# Altium PCB PCB1.PcbDoc
Units mm, origin at the board's own origin, x right, y up, seen from the top; angles counter-clockwise.
Board outline 68.58 x 48.26 mm, 4 copper layers (Top Layer, Internal Plane 1, Internal Plane 2, Bottom Layer); 37 components, 37 nets, 168 pads, 11 vias.
Unrouted connection lines stored in the file: 2.
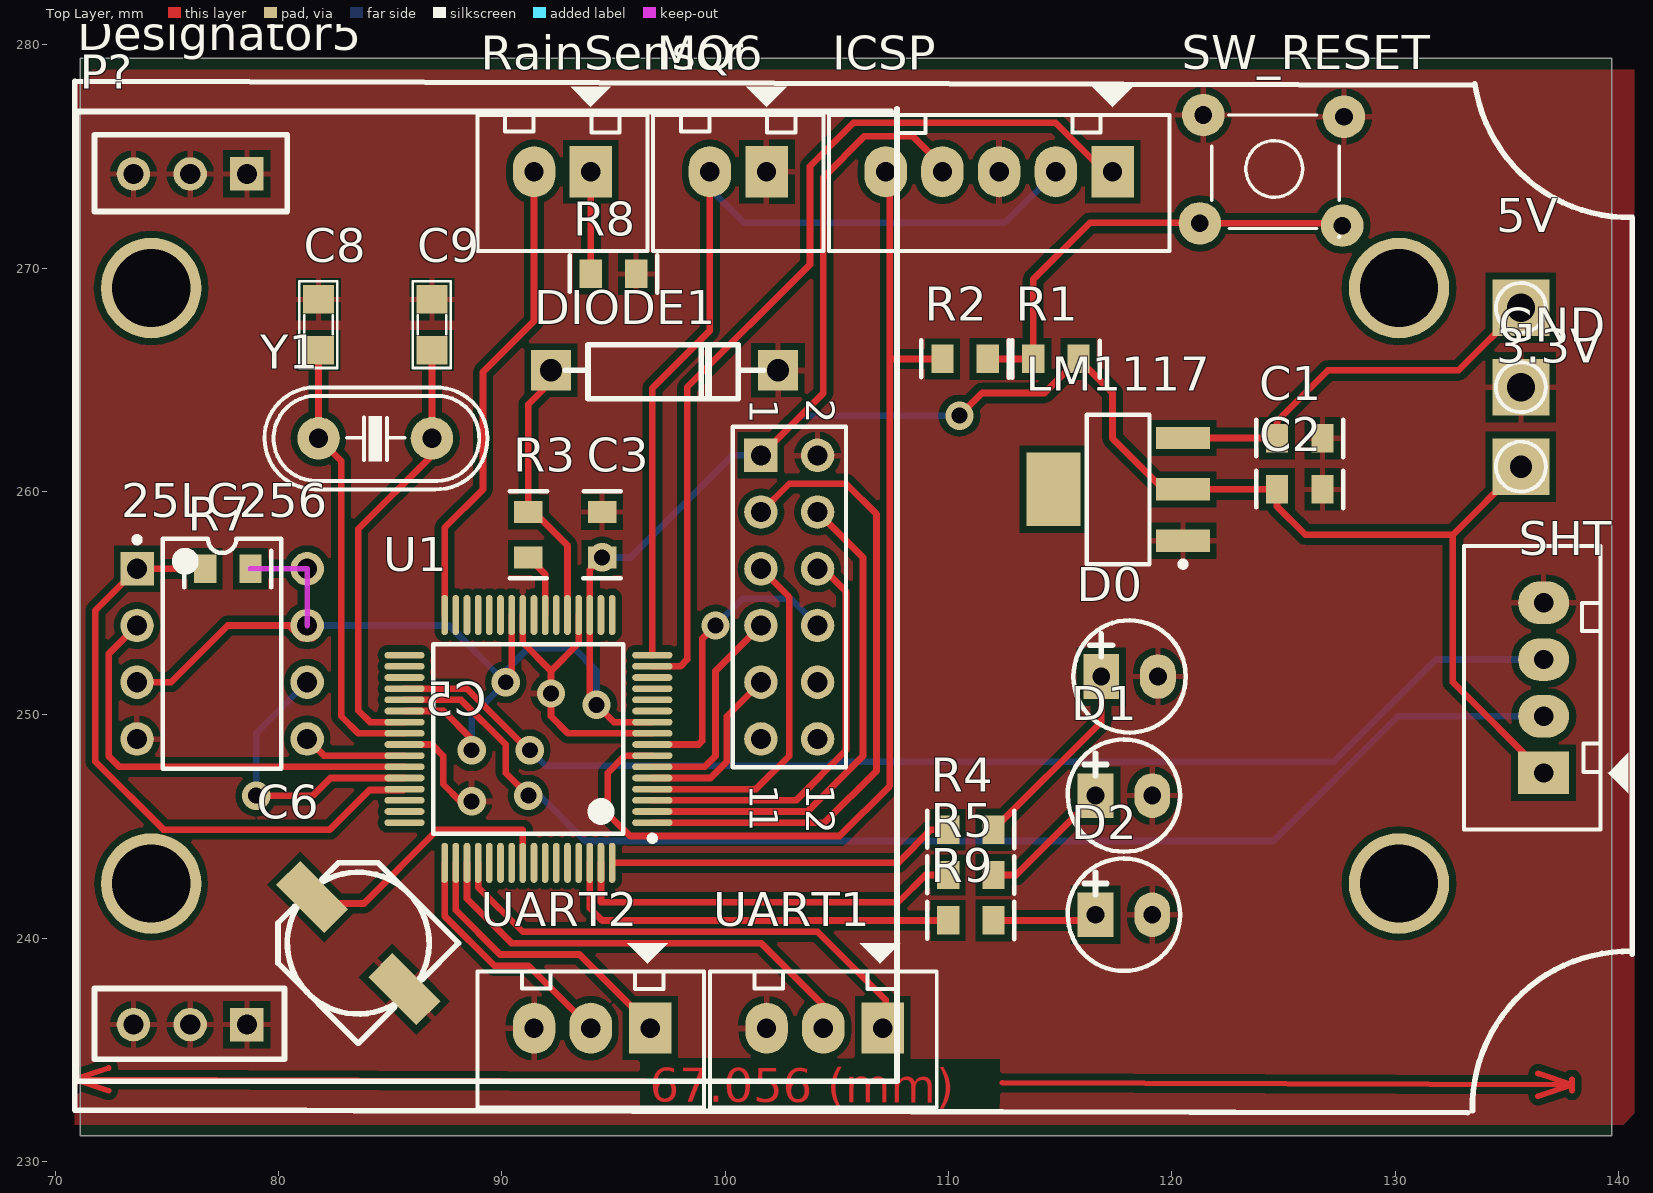
[diagram p0: Top Layer view]
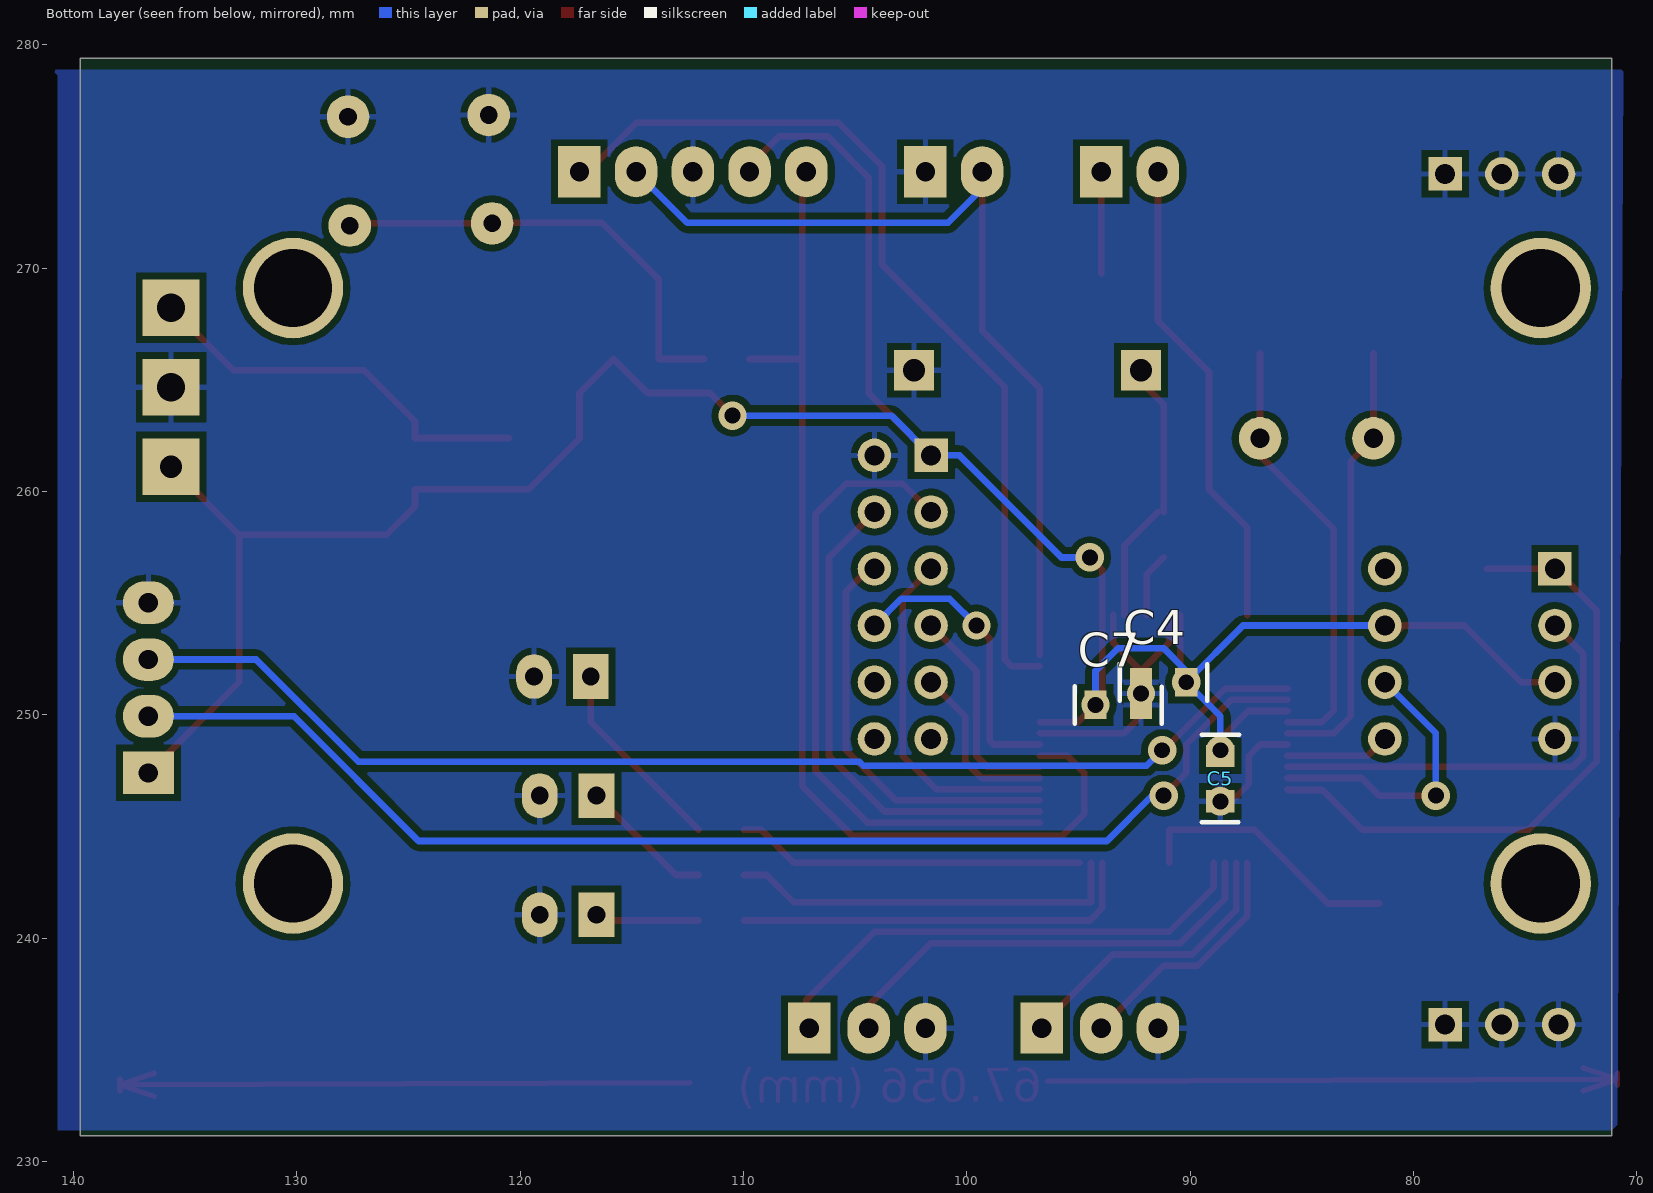
[diagram p1: Bottom Layer view, seen from below]
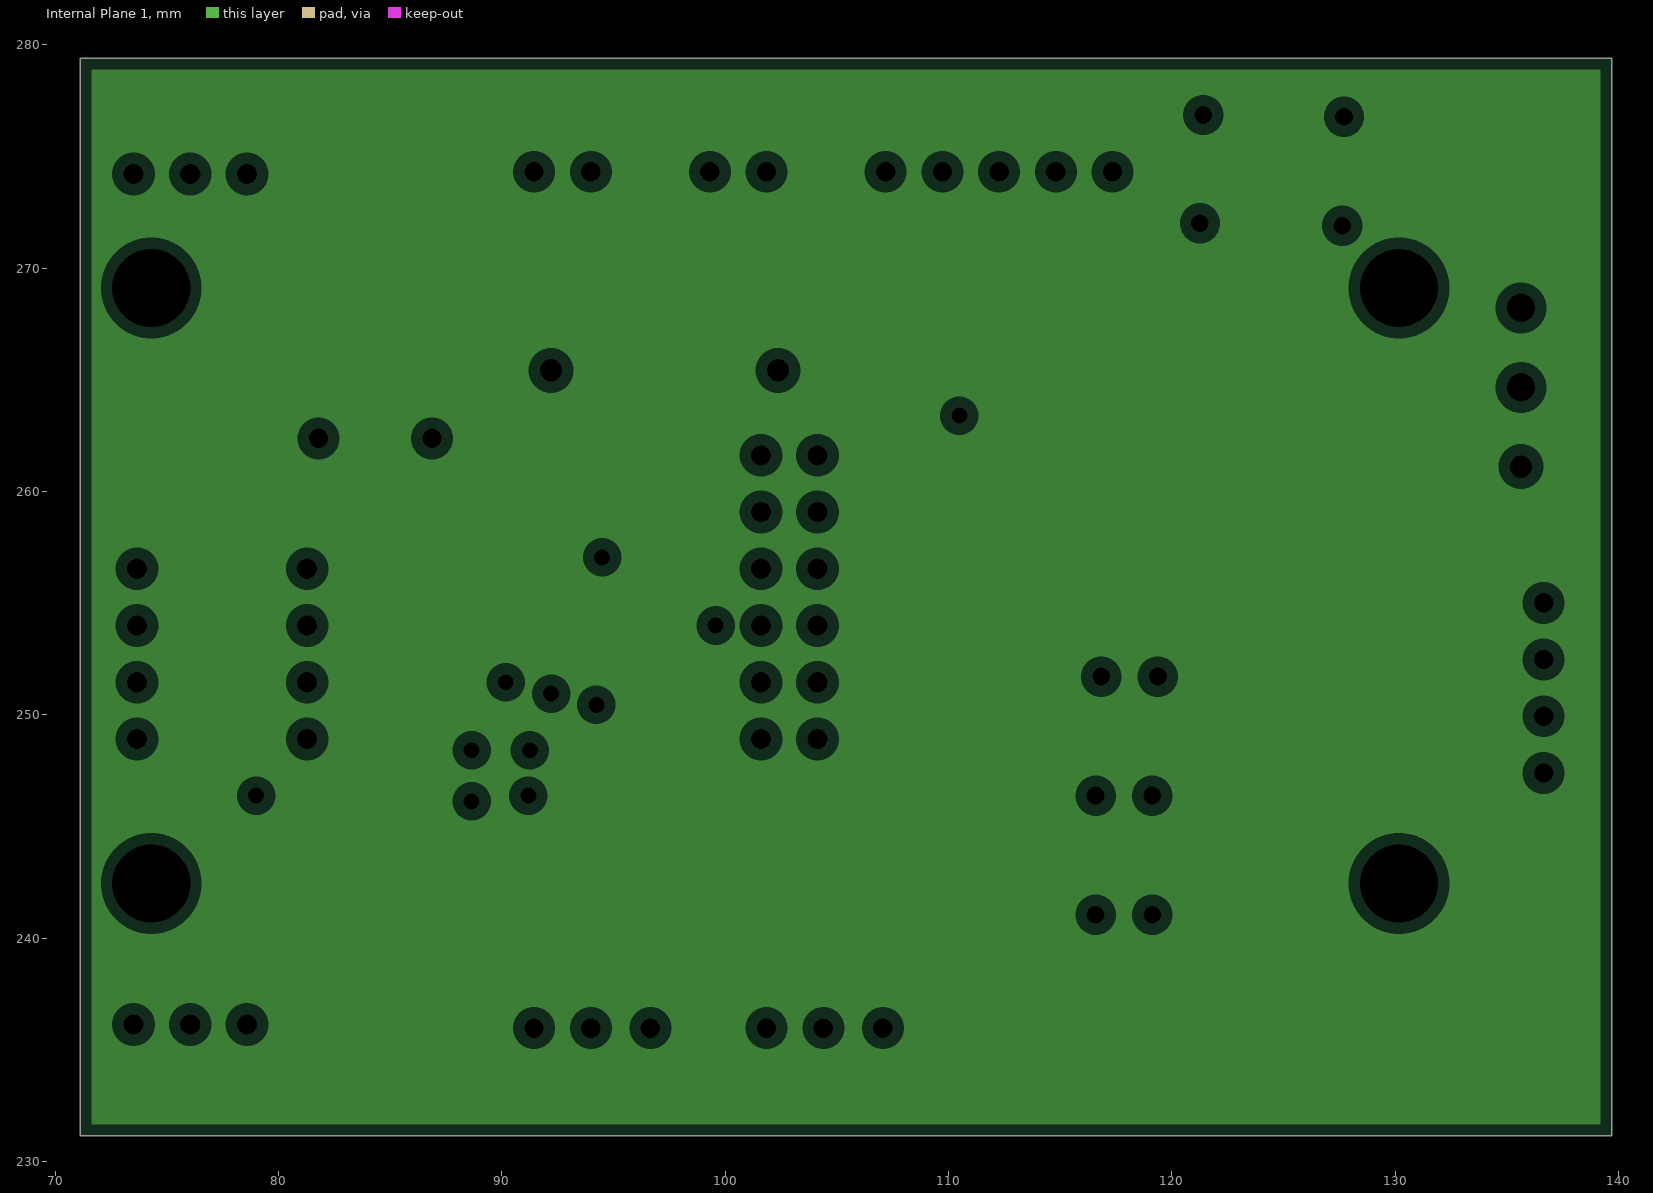
[diagram p2: Internal Plane 1, clearances drawn from the general rule]
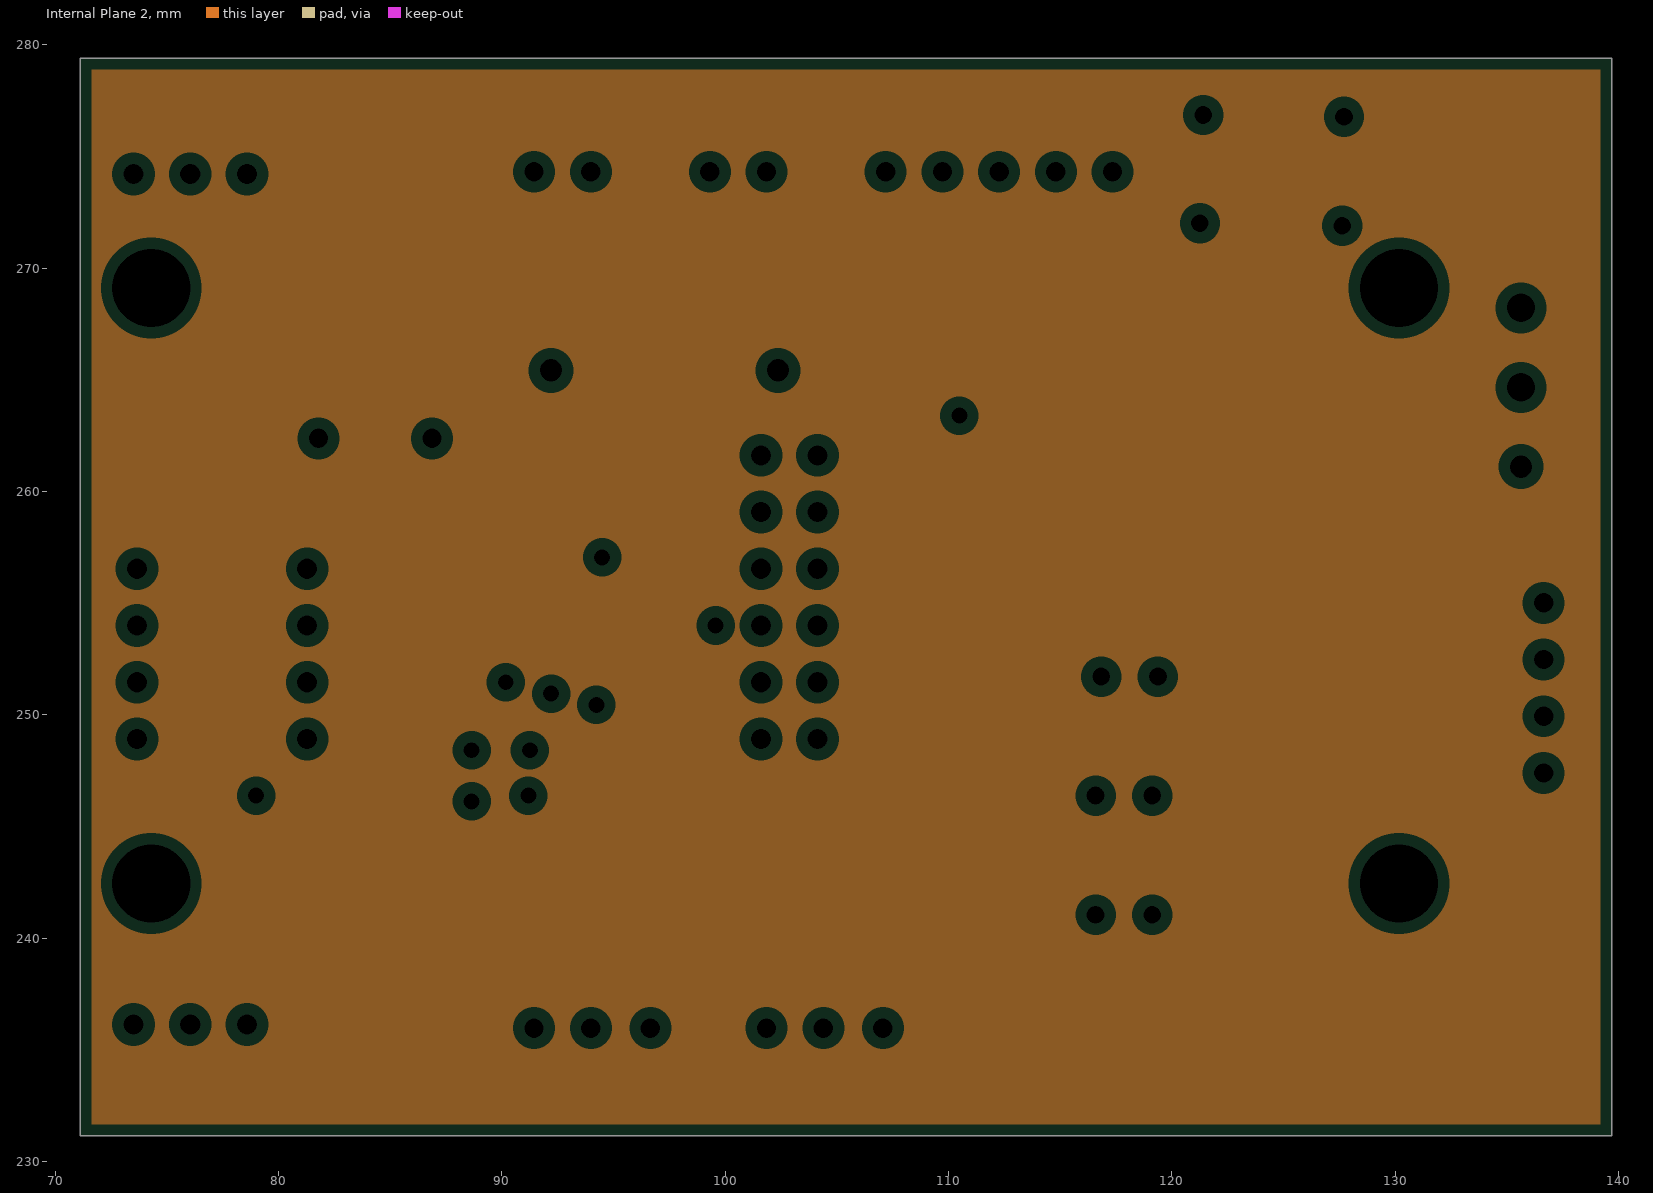
[diagram p3: Internal Plane 2, clearances drawn from the general rule]
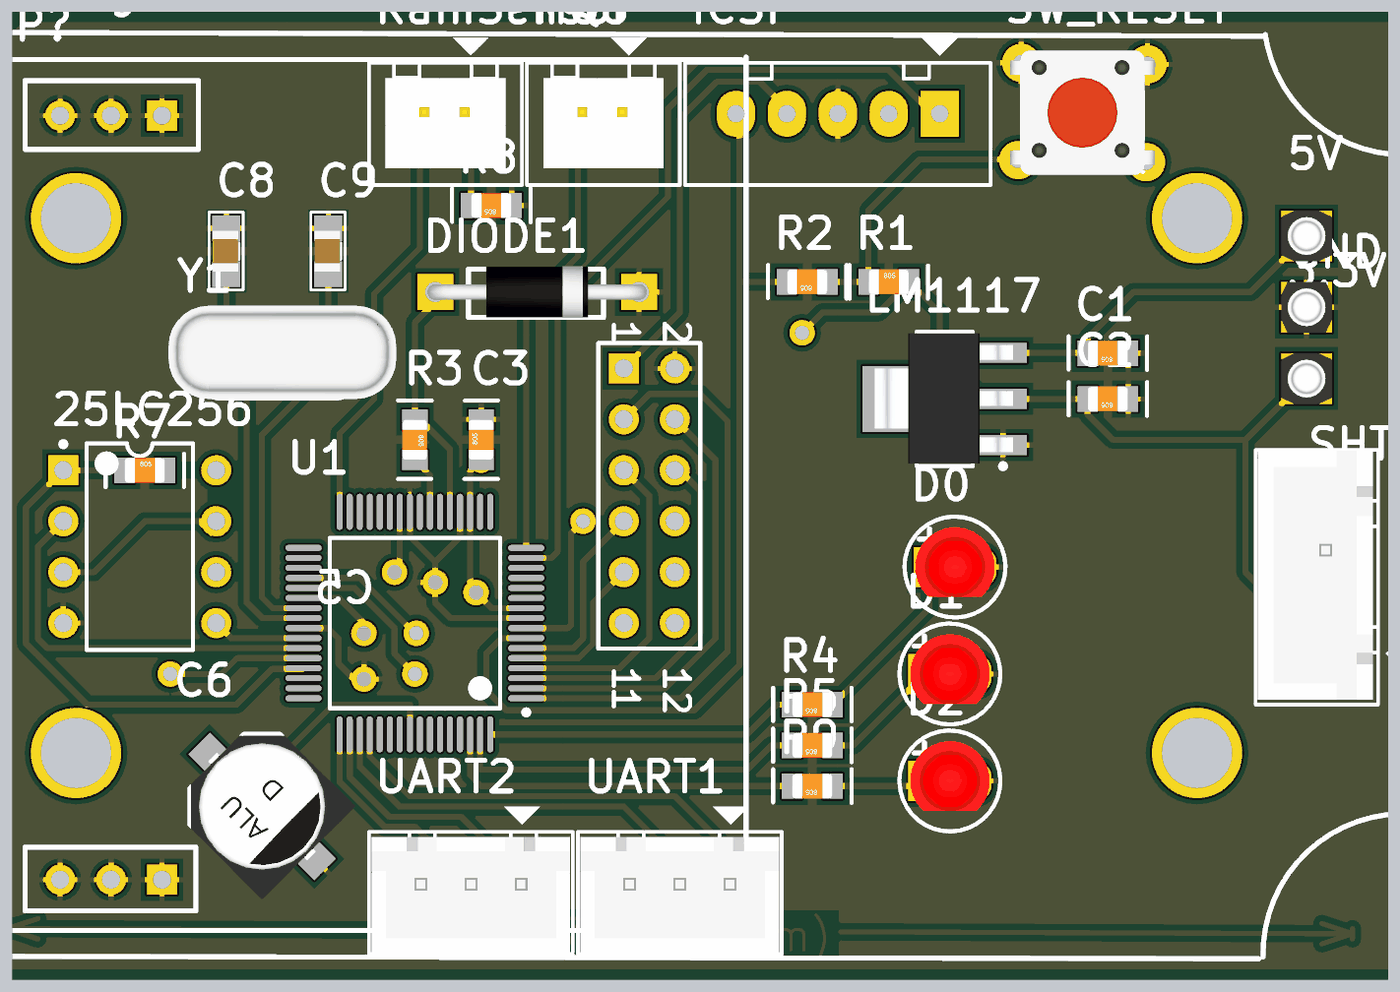
[diagram p4: 3D render of the assembled board from above, using the file's embedded part models]
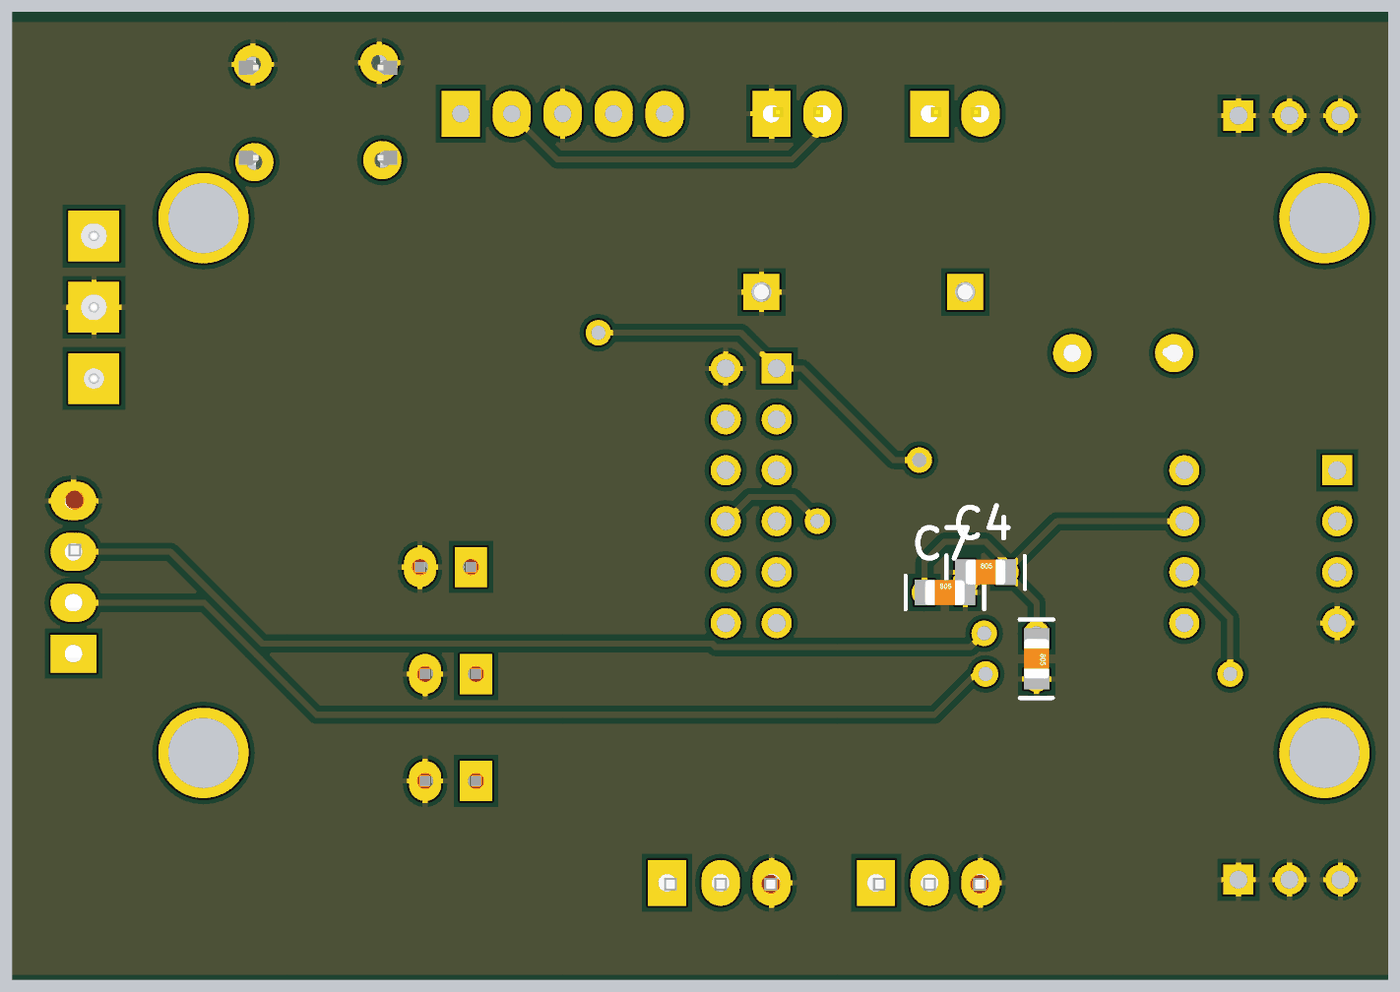
[diagram p5: 3D render of the assembled board from below, using the file's embedded part models]

## Layer stack, top to bottom
Top Layer: signal copper 0.0356
Dielectric: dielectric 0.32, FR-4, Dk 4.8
Internal Plane 1: plane copper 0.0356
Dielectric: dielectric 0.32, FR-4, Dk 4.8
Internal Plane 2: plane copper 0.0356
Dielectric: dielectric 0.32, FR-4, Dk 4.8
Bottom Layer: signal copper 0.0356

## Board outline
71.12,279.4 71.12,231.14 139.7,231.14 139.7,279.4 71.12,279.4

## Design rules (kind name [scope] priority, off if disabled: settings)
Clearance [All] p1: gap=0.3
PlaneClearance [All] p1: clearance=0.508
PlaneConnect [All] p1: planeconnectstyle=Relief reliefexpansion=0.508 reliefentries=4 reliefconductorwidth=0.254 reliefairgap=0.254
PolygonConnect [All] p1: connectstyle=Relief reliefconductorwidth=0.254 reliefentries=4 polygonreliefangle="90 Angle"
RoomDefinition Sheet1 [InComponentClass('Sheet1')] p1: confinementstyle=ConfineIn formatcopy=TRUE lockcomponents=FALSE outline 116.459,124.714 358.648,124.714 358.648,171.45 116.459,171.45
RoutingVias [All] p1: holewidth=0.6 width=1 viastyle="Through Hole" minholewidth=0.711 minwidth=1.27 maxholewidth=0.711 maxwidth=1.27
SilkscreenOverComponentPads [All] p1: minsilkscreentomaskgap=0.254
SolderMaskExpansion [All] p1: expansion=0.102
Width [All] p1: maxlimit=0.3 minlimit=0.3 preferedwidth=0.3
25 further rules are at their usual default settings.

## Classes and differential pairs
component class Sheet1: 3.3V 5V 25LC256 C1 C2 C3 C4 C5 C6 C7 C9 D0 D1 D2 DIODE1 GND ICSP LM1117 MQ6 P? R1 R2 R3 R4 R5 R7 R8 R9 RainSensor SHT SW_RESET U1 UART1 UART2 Y1

## Components (designator, comment, footprint, x,y, rotation, side; value= is the part's Value field where it differs from the comment)
3.3V "TP" TP1#1 135.636,261.112 r90 top
5V "TP" TP1#2 135.636,268.224 r90 top
25LC256 "25LC256" DIP-8 77.47,252.73 r0 top
C1 "Cap" C0805 125.73,262.382 r180 top
C2 "Cap" C0805 125.73,260.096 r180 top
C3 "Cap" C0805 94.488,258.064 r90 top
C4 "Cap" C0805 91.186,251.46 r180 bottom
C5 "Cap" C0805 88.646,247.142 r270 bottom
C6 "Cap2" "CAP P 6.3x5.4" 83.566,239.776 r135 top
C7 "Cap" C0805 93.218,250.444 r180 bottom
C8 "Cap" SM-0805 81.788,267.462 r270 top
C9 "Cap" SM-0805 86.868,267.462 r270 top
D0 "LED nguon" LED3mm 118.11,251.714 r0 top
D1 "LED1" LED3mm 117.856,246.38 r0 top
D2 "LED" LED3mm 117.856,241.046 r0 top
Designator5 "Comment" FT-131-BOX 102.616,255.27 r0 top
DIODE1 "Diode" DIODE/POW/1A 92.202,265.43 r0 top
GND "TP" TP1#2 135.636,264.668 r0 top
ICSP "ICSP" CON5 117.348,274.32 r180 top
LM1117 "Header 3" SOT223-4N 117.602,260.096 r180 top
MQ6 "MQ-6" CON2 101.854,274.32 r180 top
P? "MRF24J40MB" "MRF24J40MB_board - duplicate" 105.41,262.89 r180 top
R1 "Res1" C0805 114.808,265.938 r0 top
R2 "res" C0805 110.744,265.938 r180 top
R3 "Res1" C0805 91.186,258.064 r270 top
R4 "Res1" C0805 110.998,244.856 r180 top
R5 "Res1" C0805 110.998,242.824 r180 top
R7 "Res Semi" C0805 77.724,256.54 r0 top
R8 "10k" C0805 94.996,269.748 r180 top
R9 "220R" C0805 110.998,240.792 r180 top
RainSensor "RainSensor" CON2 93.98,274.32 r180 top
SHT "SHT10 conector" CON4 136.652,247.396 r90 top
SW_RESET "SW" SW4 121.412,276.86 r0 top
U1 "PIC24FJ128GA306" TQFP-PT64_N 91.186,248.92 r180 top
UART1 "UART1" CON3 106.934,235.966 r180 top
UART2 "UART2" CON3 96.52,235.966 r180 top
Y1 "XTAL" XT2 84.328,262.382 r180 top

## Footprints (in the part's own frame and the unit in brackets; to place one, negate y for a bottom-side part, rotate by r counter-clockwise, add the part's x,y. Pads: shape width x height; smd on the part's side, far side on the other; paste and mask are expansions set on the pad)
C0805 [mm] "Chip Resistor; Body 2.0 x 1.3 mm (LxW typ)"
  rect 1x1.27 smd: 1(-1.016,0) 2(1.016,0)
  silkscreen extent -1.96,-0.84 1.96,0.84, body extent -1,-0.62 1,0.63, height 0.78
"CAP P 6.3x5.4" [mil]
  rect 120x60 smd: 1(115,0) 2(-115,0)
  silkscreen extent -125,-125 125,125, body extent -138,-130 138,130, height 213
CON2 [mil] "CON2"
  rect 75x90 hole 34: 1(0,0)
  oval 75x90 hole 34: 2(100,0)
  silkscreen extent -100,-150 200,140, body extent -68,-70 168,107, height 236
CON3 [mil] "CON 3"
  rect 75x90 hole 34: 1(-5,0)
  oval 75x90 hole 34: 2(100,0) 3(200,0)
  silkscreen extent -100,-150 300,140, body extent -95,-90 295,136, height 276
CON4 [mil] "CON4"
  rect 75x90 hole 34: 1(0,0)
  oval 75x90 hole 34: 2(100,0) 3(200,0) 4(300,0)
  silkscreen extent -100,-150 400,140, body extent -90,-90 398,136, height 276
CON5 [mil] "CON5"
  rect 75x90 hole 34: 1(0,0)
  oval 75x90 hole 34: 2(100,0) 3(200,0) 4(300,0) 5(400,0)
  silkscreen extent -100,-150 500,140
DIODE/POW/1A [mm]
  rect 1.8x1.8 hole 1: 1(0,0) 2(10.16,0)
  silkscreen extent 0.64,-1.27 9.53,1.14, body extent -0.38,-1.28 10.54,1.28, height 2.55
DIP-8 [mm] "DIP; 8 Leads; Row Spacing 7.62 mm; Pitch 2.54 mm"
  rect 1.5x1.5 hole 0.9: 1(-3.81,3.81)
  round 1.5 hole 0.9: 2(-3.81,1.27) 3(-3.81,-1.27) 4(-3.81,-3.81) 5(3.81,-3.81) 6(3.81,-1.27) 7(3.81,1.27) 8(3.81,3.81)
  silkscreen extent -3.93,-5.15 2.65,5.23, body extent -3.6,-5.15 3.6,5.15, height 5.08
FT-131-BOX [mm]
  round 4.5 hole 3.5: 0(-28.321,-12.827) 0(-28.321,13.843) 0(27.559,-12.827) 0(27.559,13.843)
  silkscreen extent -31.75,-23.09 38,23.1
LED3mm [mm]
  rect 1.6x2 hole 0.8: 1(-1.27,0)
  oval 1.6x2 hole 0.8: 2(1.27,0)
  silkscreen extent -2.52,-2.51 2.51,2.52, body extent -1.99,-1.5 1.99,1.99, height 5.38
"MRF24J40MB_board - duplicate" [mm]
  rect 1.5x1.5 hole 0.9: 1(3.81,1.27) 13(26.829,-11.335) 16(26.829,26.765)
  round 1.5 hole 0.9: 2(1.27,1.27) 3(3.81,3.81) 4(1.27,3.81) 5(3.81,6.35) 6(1.27,6.35) 7(3.81,8.89) 8(1.27,8.89) 9(3.81,11.43) 10(1.27,11.43) 11(3.81,13.97) 12(1.27,13.97) 14(29.369,-11.335) 15(31.909,-11.335) 17(29.369,26.765) 18(31.909,26.765)
  silkscreen extent -2.29,-14.26 34.45,29.31, body extent 0,-12.6 33.18,28.04, height 7
SM-0805 [mil] "Compoment SMD 80x50mil"
  rect 50x55 smd: 1(-45,0) 2(45,0)
  silkscreen extent -77,-34 76,33, body extent -40,-27 40,23, height 24
SOT223-4N [mm] "SOT223, 4-Leads, Body 6.5x3.5mm, Pitch 2.3mm, Lead Span 7mm, IPC Medium Density"
  rect 2.4x1 smd: 1(-2.9,2.3) 2(-2.9,0) 3(-2.9,-2.3)
  rect 2.4x3.3 smd: 4(2.9,0)
  silkscreen extent -3.03,-3.35 1.4,3.47, body extent -3.39,-3.27 3.5,3.23, height 1.72
SW4 [mil] "SW button 4pin, 250 x250 mil"
  round 75 hole 31: 1(0,0) 2(245,-195) 3(248,-3) 4(-6,-191)
  silkscreen extent 15,-215 240,0, body extent -36,-220 276,24, height 276
TP1#1 [mm] "Test point"
  rect 2.54x2.54 hole 1: 1(0,0)
  silkscreen extent -1.12,-1.12 1.12,1.11, body extent -1.27,-1.27 1.27,1.27, height 4.52
TP1#2 [mm] "Test point"
  rect 2.54x2.54 hole 1.27: 1(0,0)
  silkscreen extent -1.12,-1.12 1.12,1.11, body extent -1.27,-1.27 1.27,1.27, height 4.52
TQFP-PT64_N [mm] "Thin QFP, 64-Leads, Body 10x10mm, Pitch 0.5mm, IPC Medium Density"
  oval 1.8x0.3 smd: 1(-5.55,3.75) 2(-5.55,3.25) 3(-5.55,2.75) 4(-5.55,2.25) 5(-5.55,1.75) 6(-5.55,1.25) 7(-5.55,0.75) 8(-5.55,0.25) 9(-5.55,-0.25) 10(-5.55,-0.75) 11(-5.55,-1.25) 12(-5.55,-1.75) 13(-5.55,-2.25) 14(-5.55,-2.75) 15(-5.55,-3.25) 16(-5.55,-3.75) 33(5.55,-3.75) 34(5.55,-3.25) 35(5.55,-2.75) 36(5.55,-2.25) 37(5.55,-1.75) 38(5.55,-1.25) 39(5.55,-0.75) 40(5.55,-0.25) 41(5.55,0.25) 42(5.55,0.75) 43(5.55,1.25) 44(5.55,1.75) 45(5.55,2.25) 46(5.55,2.75) 47(5.55,3.25) 48(5.55,3.75)
  oval 0.3x1.8 smd: 17(-3.75,-5.55) 18(-3.25,-5.55) 19(-2.75,-5.55) 20(-2.25,-5.55) 21(-1.75,-5.55) 22(-1.25,-5.55) 23(-0.75,-5.55) 24(-0.25,-5.55) 25(0.25,-5.55) 26(0.75,-5.55) 27(1.25,-5.55) 28(1.75,-5.55) 29(2.25,-5.55) 30(2.75,-5.55) 31(3.25,-5.55) 32(3.75,-5.55) 49(3.75,5.55) 50(3.25,5.55) 51(2.75,5.55) 52(2.25,5.55) 53(1.75,5.55) 54(1.25,5.55) 55(0.75,5.55) 56(0.25,5.55) 57(-0.25,5.55) 58(-0.75,5.55) 59(-1.25,5.55) 60(-1.75,5.55) 61(-2.25,5.55) 62(-2.75,5.55) 63(-3.25,5.55) 64(-3.75,5.55)
  silkscreen extent -5.68,-4.25 4.25,4.57, body extent -5,-5 5,5, height 1.2
XT2 [mil] "Footpin for Crystal 2 pin"
  round 75 hole 34: 1(-100,0) 2(100,0)
  silkscreen extent -198,-90 195,90, body extent -233,-93 213,90, height 138

## Part data
3.3V 5V GND: library part TP1, "Test Point"
C1 C2 C3 C4 C5 C6 C7 C8 C9: "Capacitor"
D0 D1: library part LED0, "Typical INFRARED GaAs LED"
D2: "LED Single colour Green and Red"
DIODE1: "Default Diode"
ICSP: library part "Header 5", "Header, 5-Pin"
LM1117: "Header, 3-Pin"
MQ6 RainSensor: library part "Header 2", "Header, 2-Pin"
P?: library part "Header 9X2", "Header, 9-Pin, Dual row"
R1 R3 R4 R5: "Resistor"
R2: library part Res1, "Resistor"
R7: "Semiconductor Resistor"
R8 R9: library part R, "Resistor 1/4W"
SHT: library part "Header 4", "Header, 4-Pin"
SW_RESET: library part SW4, "Switch button 4 pin"
UART1 UART2: library part Con3, "Connector 3"
Y1: "Crystal Oscillator"

## Via types
v1: diameter 1.27, hole 0.711, Top Layer to Bottom Layer, 11 vias

## Nets (pads, with @x,y where several pads share a name; then routed paths per layer and width w, separated by ;. In a path a pad name is that pad's centre, name@x,y a point inside that pad or via, vN(x,y) a via of type N, cw(c..) or ccw(c..) an arc to the next point about the centre after c; other vN are vias at no path point)
3.3VDC_VCC: 3.3V.1 25LC256.3 25LC256.7 25LC256.8 C2.2 C3.1 C4.2 C5.1 C7.1 P?.1 R1.2 R7.2 SHT.1 U1.10 U1.19 U1.26 U1.38 | length 130.2
  Top Layer w0.3: 25LC256.3 75.184,251.46 77.724,254 80.464,254 81.041,253.423 81.519,253.423 25LC256.7@81.688,253.592 ; U1.38 87.396,250.17 88.646,248.92 v1(88.646,248.412) ; v1(90.17,251.46) 90.436,251.726 U1.26 ; v1@93.936,250.742 U1.19 93.936,256.496 v1(94.488,257.048) ; v1(94.234,250.444) 95.008,249.67 U1.10 ; P?.1 104.394,264.414 104.394,274.066 106.241,275.913 108.389,275.913 109.728,274.574 109.728,274.32 ; v1(110.49,263.398) 111.506,264.414 114.3,264.414 R1.2 117.348,264.414 117.348,262.382 119.634,260.096 120.396,260.096 ; 120.502,260.096 C2.2 124.714,259.334 125.984,258.064 132.588,258.064 ; 3.3V.1 132.588,258.064 ; SHT.1 132.588,251.46 132.588,258.064
  Bottom Layer w0.3: 25LC256.7 87.63,254 v1(90.17,251.46) ; v1(88.646,248.412) 88.646,249.936 v1(90.17,251.46) ; v1(94.234,250.444) 94.234,251.968 93.218,252.984 91.186,252.984 90.17,251.968 v1(90.17,251.46) ; v1(94.488,257.048) 95.758,257.048 100.33,261.62 P?.1 103.378,263.398 v1(110.49,263.398)
5VDC: 5V.1 C1.2 LM1117.3 | length 18
  Top Layer w0.3: LM1117.3 124.7,262.396 C1.2 124.714,263.144 127,265.43 132.842,265.43 5V.1
AN8: DIODE1.1 R3.1 U1.21 | length 12
  Top Layer w0.3: R3.1 91.186,263.906 92.202,264.922 DIODE1.1 ; R3.1@91.44,259.08 92.936,257.584 U1.21
CS1: P?.6 U1.3 | length 18.5
  Top Layer w0.3: U1.3 103.168,246.17 105.41,248.412 105.41,255.524 P?.6@104.14,256.794
CS2: 25LC256.1 R7.1 U1.45 | length 28.3
  Top Layer w0.3: R7.1 25LC256.1 71.79,254.67 71.79,247.909 74.843,244.856 82.296,244.856 84.074,246.634 85.6,246.634 U1.45
CVREF+: ICSP.2 MQ6.2 U1.16 | length 40.6
  Top Layer w0.3: U1.16 96.736,264.63 99.314,267.208 MQ6.2
  Bottom Layer w0.3: MQ6.2 99.314,273.558 100.838,272.034 112.522,272.034 ICSP.2
GND: 25LC256.4 C1.1 C2.1 C3.2 C4.1 C5.2 C6.2 C7.2 C8.1 C9.1 D0.2 D1.2 D2.2 DIODE1.2 GND.1 ICSP.3 LM1117.1 MQ6.1 P?.2 P?.13 P?.14 P?.15 P?.16 P?.17 P?.18 R8.1 SHT.4 SW_RESET.1 SW_RESET.3 U1.9 U1.20 U1.25 U1.41 UART1.3 UART2.3 | length 17.7
  Top Layer w0.3: U1.41 86.864,248.67 87.376,248.158 87.376,246.888 88.138,246.126 v1(88.646,246.126) ; U1.25 90.936,253.234 92.202,251.968 ; U1.20 93.436,253.202 92.202,251.968 ; U1.9 92.968,249.17 92.202,249.936 v1(92.202,250.952) 92.202,251.968
INT0_RAIN_SENSOR: R8.2 RainSensor.1 | length 4.6
  Top Layer w0.3: R8.2 RainSensor.1
INT1_RP21: P?.5 U1.4 | length 15.7
  Top Layer w0.3: U1.4 101.382,246.67 102.87,248.158 102.87,255.27 P?.5
LED1: R5.2 U1.63 | length 17.8
  Top Layer w0.3: U1.63 94.436,241.606 107.748,241.606 108.966,242.824 R5.2
LED2: R9.2 U1.62 | length 18.3
  Top Layer w0.3: U1.62 93.936,241.344 94.488,240.792 R9.2
NetC6_1: C6.1 U1.56 | length 12.3
  Top Layer w0.3: C6.1@81.534,241.554 83.82,241.554 87.118,244.852 90.936,244.852 U1.56
NetD0_1: D0.1 R4.1 | length 8.9
  Top Layer w0.3: R4.1 116.84,249.682 D0.1
NetD1_1: D1.1 R5.1 | length 6
  Top Layer w0.3: R5.1 113.03,242.824 D1.1
NetD2_1: D2.1 R9.1 | length 4.7
  Top Layer w0.3: R9.1 116.332,240.792 D2.1
NetR1_1: R1.1 R2.1 SW_RESET.2 SW_RESET.4 | length 20.5
  Top Layer w0.3: R2.1 R1.1 113.792,269.494 116.332,272.034 SW_RESET.4@121.158,272.034 ; SW_RESET.4 127.737,272.009 SW_RESET.2@127.762,272.034
OSCI: C9.2 U1.39 Y1.1 | length 19.7
  Top Layer w0.3: U1.39 84.086,249.67 83.566,250.19 83.566,258.318 86.868,261.62 Y1.1 C9.2@86.868,266.192
OSCO: C8.2 U1.40 Y1.2 | length 19.8
  Top Layer w0.3: C8.2@81.788,266.192 Y1.2 82.804,261.366 82.804,249.936 83.57,249.17 U1.40
PGC: ICSP.1 U1.15 | length 41.3
  Top Layer w0.3: U1.15 97.992,252.17 98.298,252.476 98.298,264.668 103.794,270.164 103.794,274.569 105.738,276.513 114.789,276.513 116.982,274.32 ICSP.1
POWER_LED: R4.2 U1.64 | length 15.7
  Top Layer w0.3: U1.64 107.734,243.37 109.22,244.856 R4.2
RAINSENSOR_OUPUT: RainSensor.2 U1.32 | length 21.5
  Top Layer w0.3: U1.32 87.436,258.378 89.154,260.096 89.154,265.348 91.44,267.634 RainSensor.2
RB10: R3.2 U1.23 | length 2.9
  Top Layer w0.3: R3.2 91.936,256.298 U1.23
RST_MRF: P?.3 U1.1 | length 28.8
  Top Layer w0.3: U1.1 104.454,245.17 106.772,247.488 106.772,258.988 105.41,260.35 102.87,260.35 P?.3
SCK1_RP26: P?.9 U1.5 | length 7.8
  Top Layer w0.3: U1.5 99.342,247.17 100.076,247.904 100.076,249.936 P?.9
SCK2_RP3: 25LC256.6 U1.44 | length 13
  Top Layer w0.3: v1(78.994,246.38) 81.534,246.38 82.324,247.17 U1.44
  Bottom Layer w0.3: v1(78.994,246.38) 78.994,249.174 25LC256.6
SCL1: SHT.2 U1.37 | length 56.7
  Top Layer w0.3: U1.37 88.166,250.67 90.17,248.666 90.17,247.396 v1(91.186,246.38)
  Bottom Layer w0.3: v1(91.186,246.38) 91.694,246.38 93.726,244.348 124.547,244.348 130.135,249.936 SHT.2
SDA1: SHT.3 U1.36 | length 54.7
  Top Layer w0.3: U1.36 88.428,251.17 91.186,248.412 v1(91.255,248.412)
  Bottom Layer w0.3: v1(91.255,248.412) 91.947,247.72 104.637,247.72 104.821,247.904 127.254,247.904 131.826,252.476 SHT.3 SHT.3@136.906,252.476
SDI1_RP27: P?.8 U1.8 | length 13.3
  Top Layer w0.3: U1.8 98.81,248.67 98.968,248.828 98.968,253.4 v1(99.568,254)
  Bottom Layer w0.3: v1(99.568,254) 100.768,255.2 102.94,255.2 P?.8
SDI2_RP4: 25LC256.2 U1.43 | length 19.8
  Top Layer w0.3: 25LC256.2 72.39,252.73 72.39,248.158 72.878,247.67 U1.43
SDO1_RP19: P?.7 U1.6 | length 9.7
  Top Layer w0.3: U1.6 99.08,247.67 99.568,248.158 99.568,251.968 P?.7
SDO2_RP2: 25LC256.5 U1.42 | length 4.7
  Top Layer w0.3: 25LC256.5 82.03,248.17 U1.42
U1RX_RP22: U1.51 UART1.2 | length 20.3
  Top Layer w0.3: U1.51 88.436,241.764 90.424,239.776 101.6,239.776 104.394,236.982 UART1.2@104.394,236.22
U1TX_RP25: U1.52 UART1.1 | length 22.7
  Top Layer w0.3: U1.52 88.936,242.28 90.932,240.284 104.14,240.284 107.188,237.236 UART1.1@107.188,235.966
U2RX_RP24: U1.49 UART2.2 | length 11
  Top Layer w0.3: U1.49 87.436,240.986 89.662,238.76 91.186,238.76 UART2.2
U2TX_RP23: U1.50 UART2.1 | length 13.1
  Top Layer w0.3: U1.50 87.936,241.248 89.916,239.268 93.472,239.268 UART2.1@96.774,235.966
VPP: ICSP.5 R2.2 U1.7 | length 48
  Top Layer w0.3: U1.7 95.516,248.17 94.742,247.396 94.742,245.565 95.737,244.57 105.124,244.57 107.372,246.818 107.372,274.136 ICSP.5 ; 107.442,265.938 R2.2
WAKE: P?.4 U1.2 | length 22.2
  Top Layer w0.3: U1.2 103.684,245.67 106.172,248.158 106.172,257.048 P?.4
pads on no net: Designator5.0 ICSP.4 LM1117.2 LM1117.4 P?.10 P?.11 P?.12 U1.11 U1.12 U1.13 U1.14 U1.17 U1.18 U1.22 U1.24 U1.27 U1.28 U1.29 U1.30 U1.31 U1.33 U1.34 U1.35 U1.46 U1.47 U1.48 U1.53 U1.54 U1.55 U1.57 U1.58 U1.59 U1.60 U1.61
copper on no net: | length 58.5
  Top Layer w0.254: 70.865,233.426 70.867,233.934 ; 72.388,233.166 70.866,233.68 ; 72.392,234.182 70.866,233.68 ; 96.37,233.583 70.866,233.68 ; 112.418,233.523 137.922,233.426 ; 136.396,232.924 137.922,233.426 ; 136.4,233.94 137.922,233.426 ; 137.921,233.172 137.923,233.68

## Polygon pours and split planes (outlines as drawn)
GND on Top Layer "Top Layer-No Net" (solid, pour order 2): 70.866,278.13 71.628,278.892 140.716,278.892 140.716,232.156 140.208,231.648 70.866,231.648
GND on Bottom Layer "Top Layer-No Net" (solid, pour order 4): 70.612,278.892 140.97,278.892 140.716,278.638 140.716,231.394 71.12,231.394 70.866,231.648
no net on Internal Plane 1 (split plane): 139.19,231.65 71.63,231.65 71.63,278.89 139.19,278.89
no net on Internal Plane 2 (split plane): 139.19,231.65 71.63,231.65 71.63,278.89 139.19,278.89

## Keep-outs
Top Layer:
  lines w0.254: 78.74,256.54 81.28,256.54 81.28,254
Keep-Out Layer:
  lines w0.3: 52.1,77.5 449.5,77.5 449.5,775.5 52.1,775.5

## Other copper
Top Layer:
  text "67.056 (mm)" at 96.621,232.668 h1.52 r359.78

## Silkscreen, mask and mechanical layers (free items; w line width, h text height)
Drill Drawing:
  text ".LEGEND" at 120.346,128.27 h1.52
  text "Drill Drawing." at 120.346,125.73 h1.52

## Dimensions
52.1,77.5 to 449.5,77.5 on Mechanical 1

## Text inside footprints (layer, text, board x,y; h text height)
P?: Top Overlay "2" at 103.632,264.16 h1.27 r270; Top Overlay "1" at 101.092,264.16 h1.27 r270; Top Overlay "1" at 101.092,246.888 h1.27 r270; Top Overlay "1" at 101.092,245.872 h1.27 r270; Top Overlay "12" at 103.632,246.888 h1.27 r270